# Altium PCB PCB1_IGNIS_v4.PcbDoc (part 1 of 2)
Units mil, origin at the board's own origin, x right, y up, seen from the top; angles counter-clockwise.
Board outline 2952.76 x 1771.65 mil, 4 copper layers (Top Layer, GND, Voltages, Bottom Layer), stack 23.756 mil thick; 108 components, 72 nets, 407 pads, 114 vias.
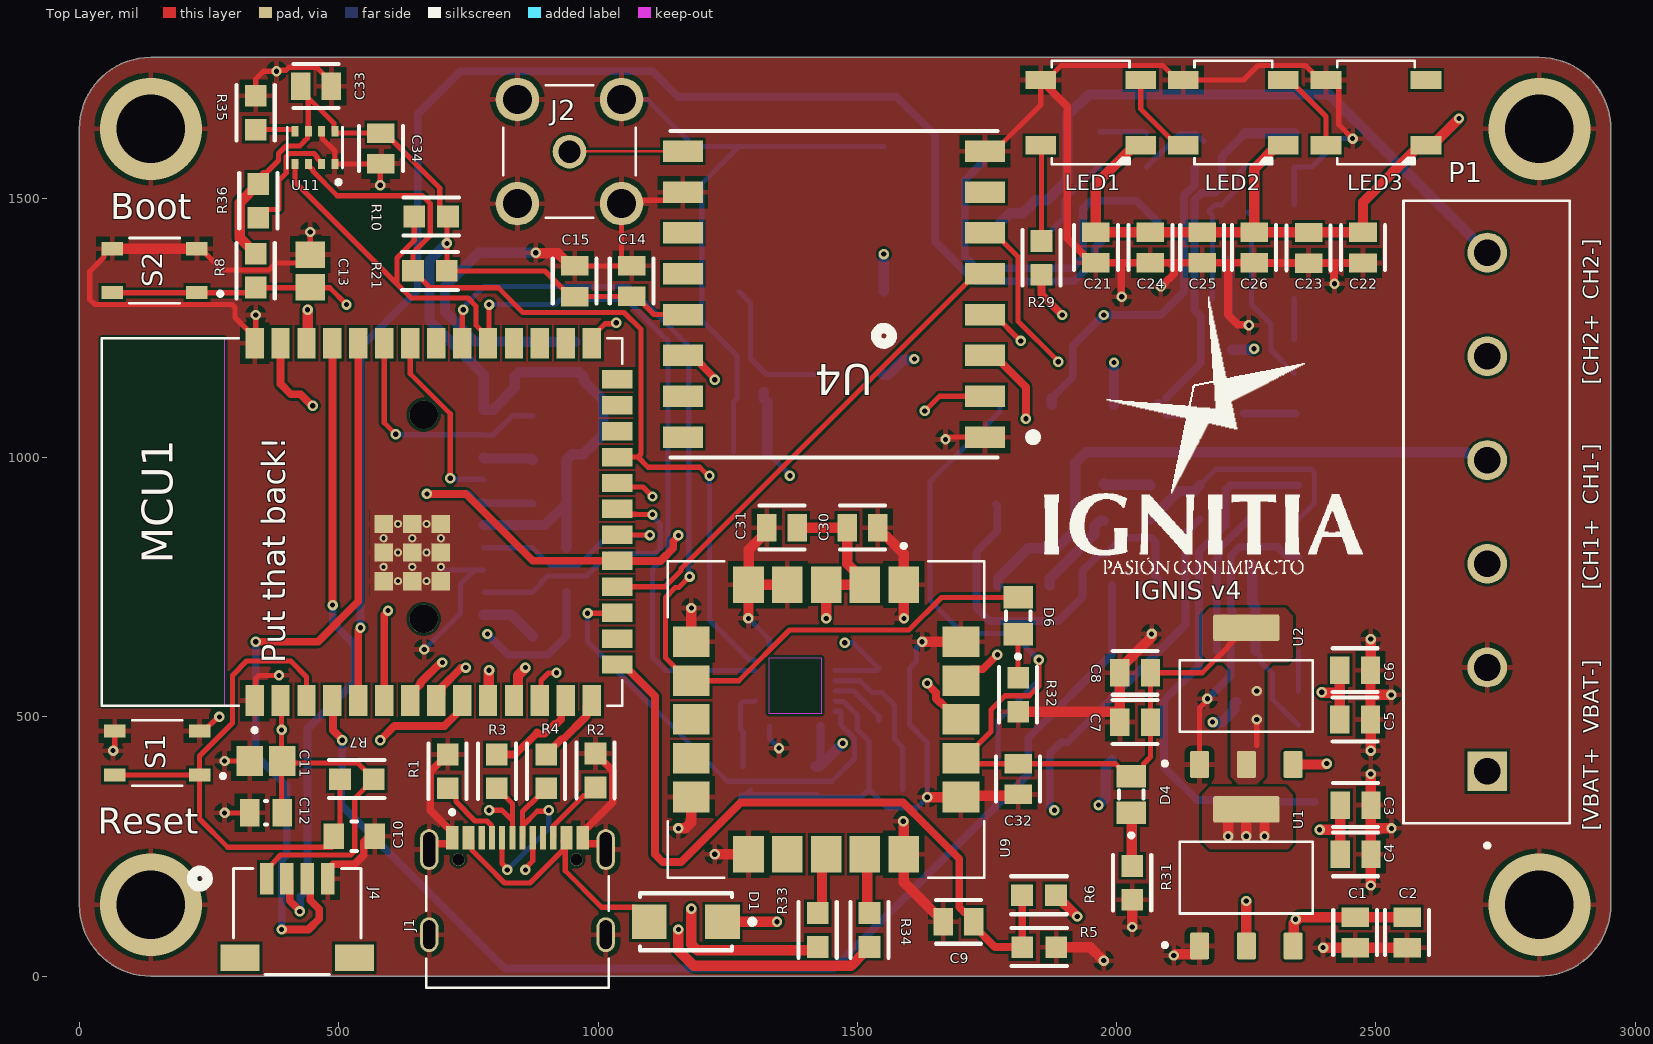
[diagram p0: Top Layer view]
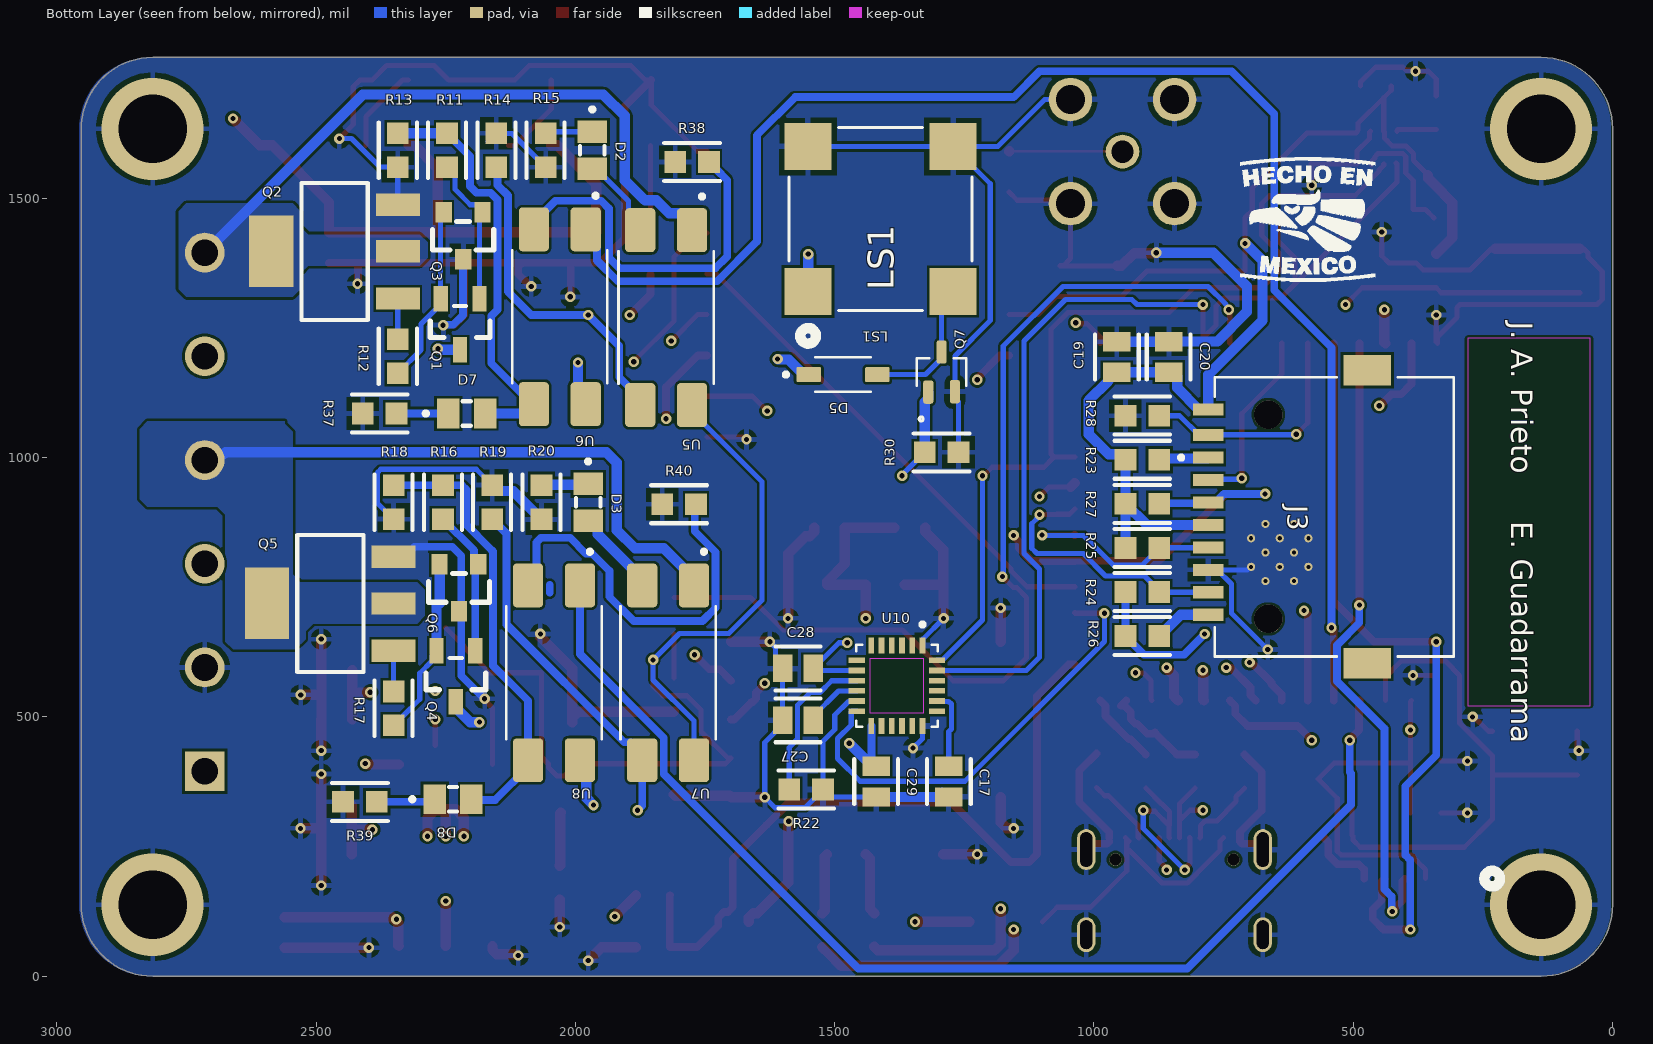
[diagram p1: Bottom Layer view, seen from below]
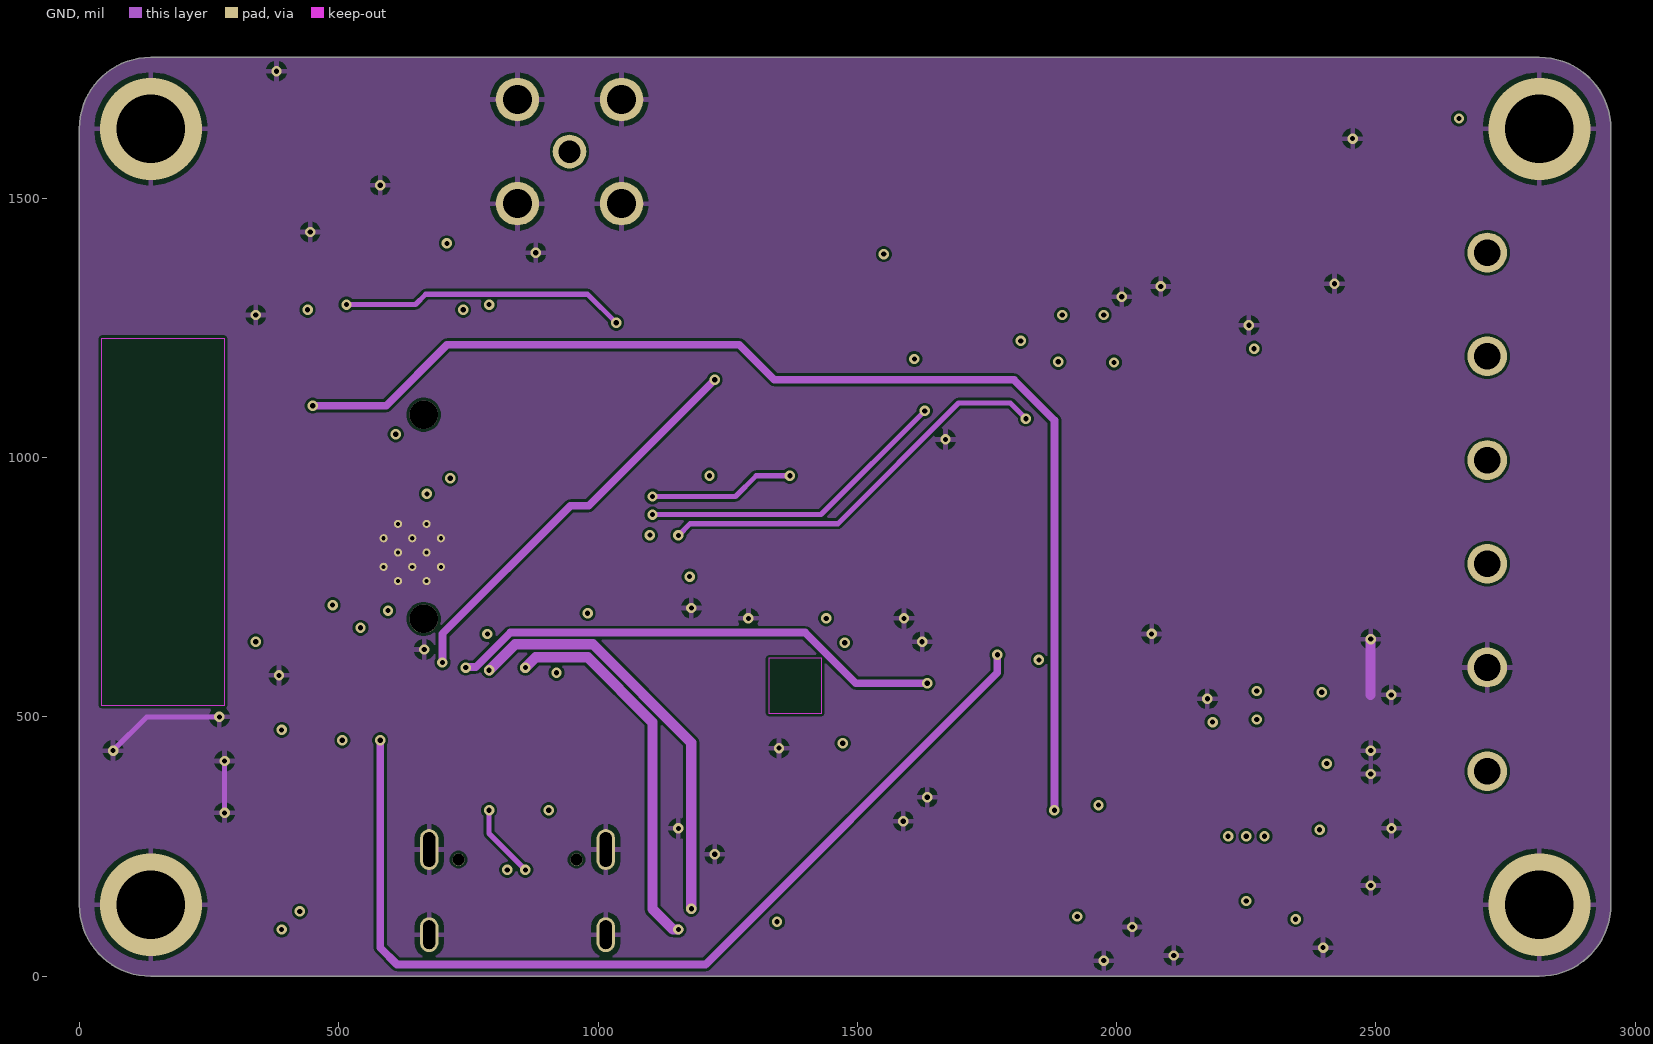
[diagram p2: GND]
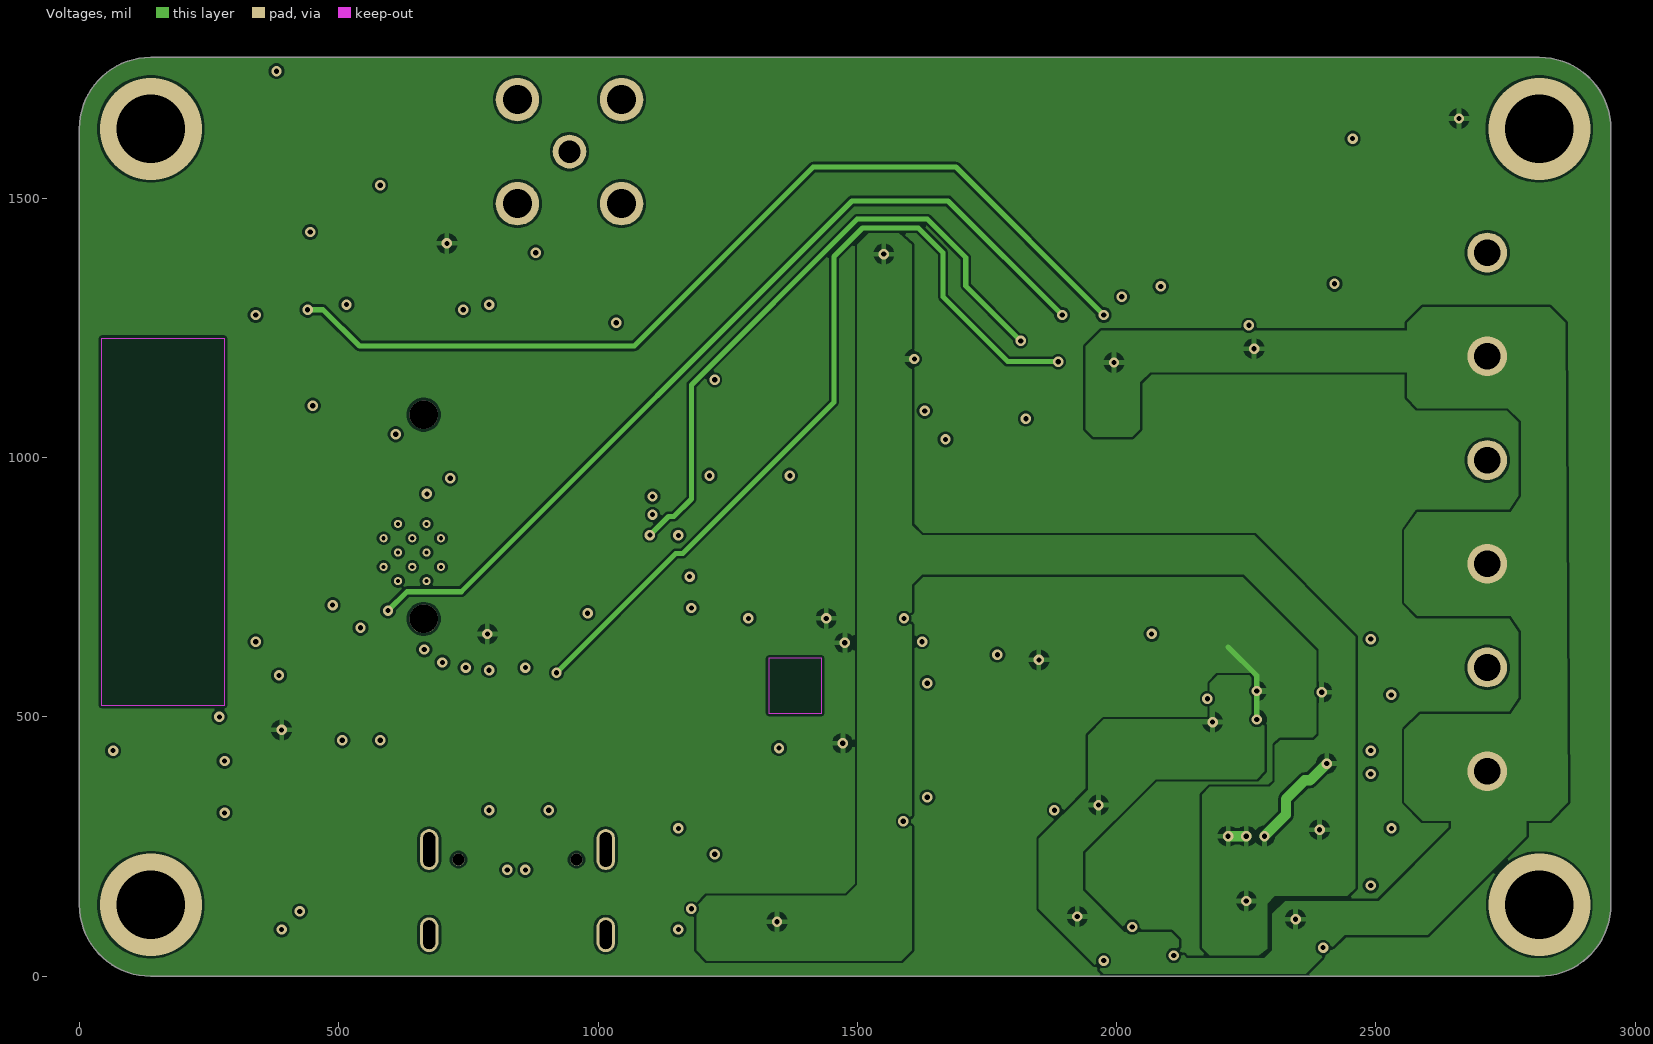
[diagram p3: Voltages]
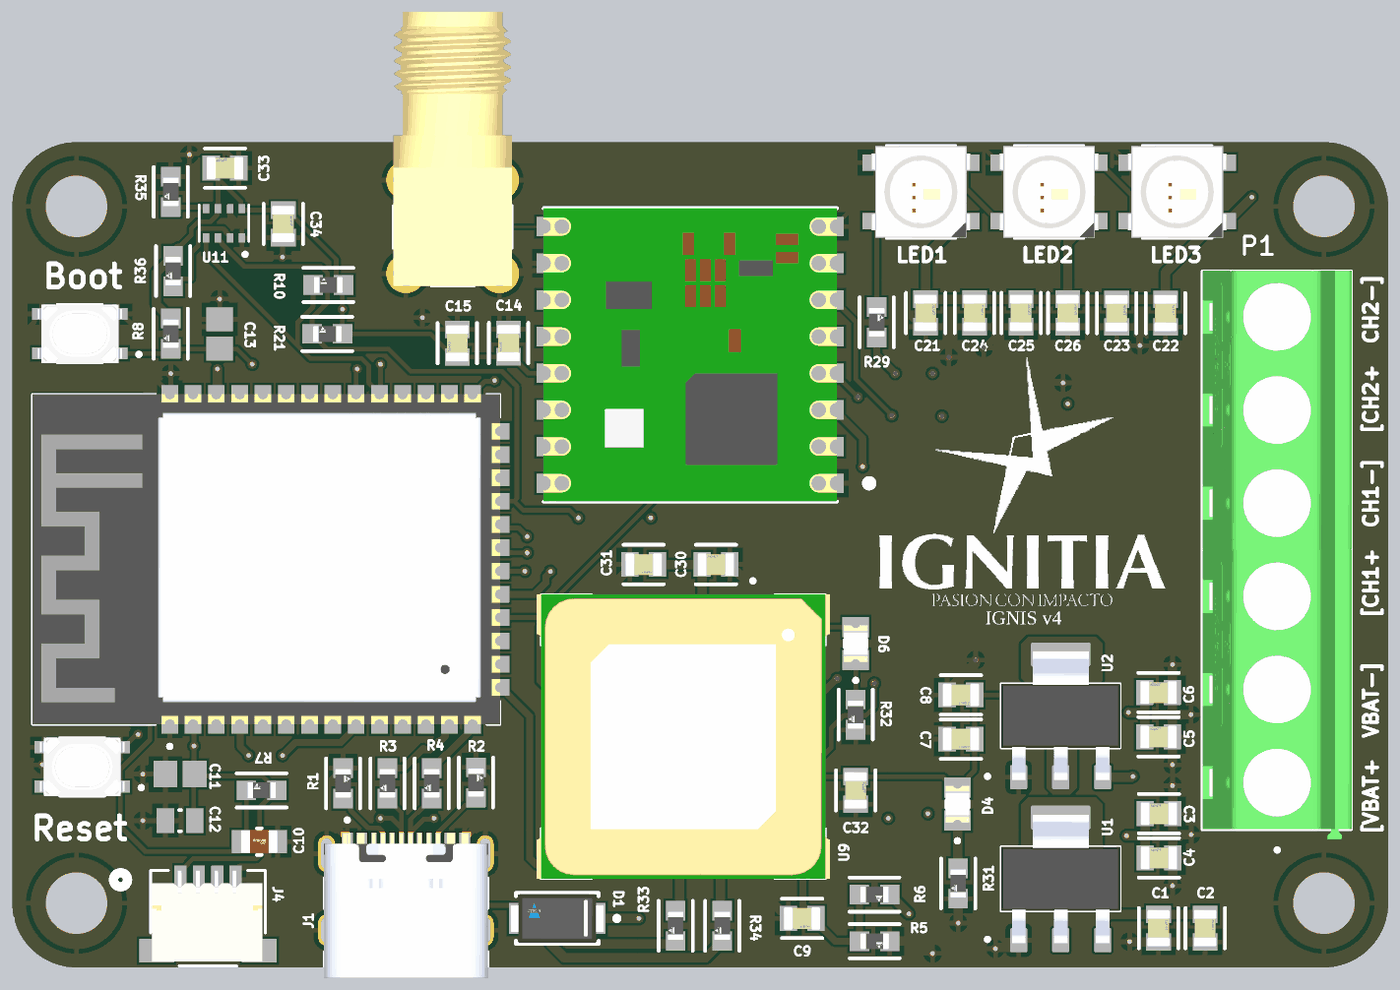
[diagram p5: 3D render of the assembled board from above, using the file's embedded part models]
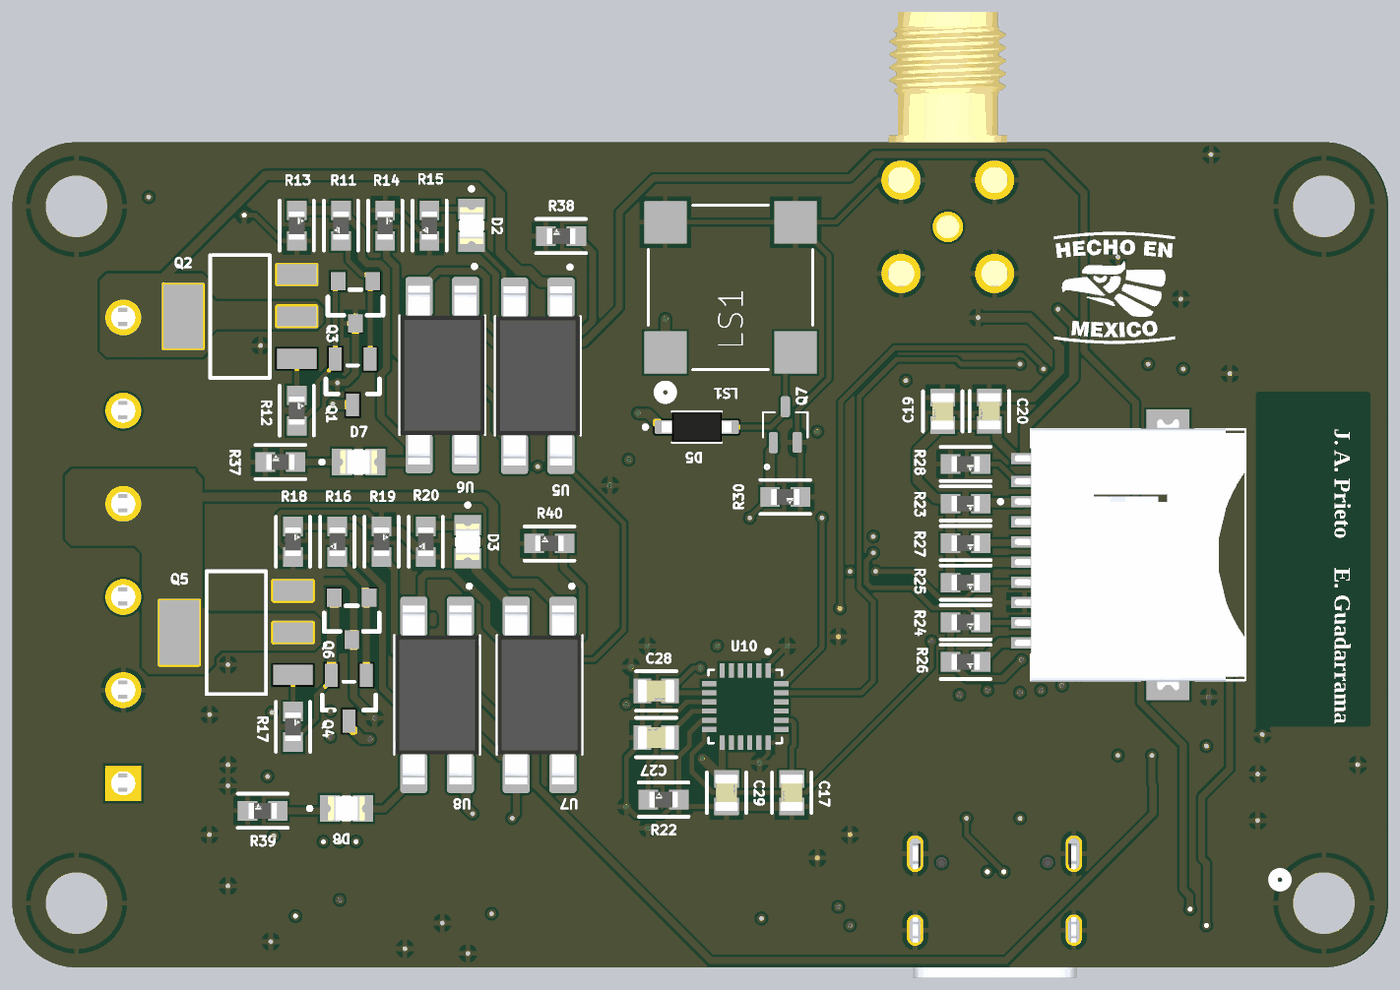
[diagram p6: 3D render of the assembled board from below, using the file's embedded part models]

## Layer stack, top to bottom
Top Solder: solder mask 0.4, Solder Resist, Dk 3.5
Top Layer: signal copper 1.4
Dielectric 2: prepreg 2.8, PP-006, Dk 4.1
GND: signal copper 1.378
Dielectric 1: dielectric 12.6, FR-4, Dk 4.8
Voltages: signal copper 1.378
Dielectric 3: prepreg 2.8, PP-006, Dk 4.1
Bottom Layer: signal copper 1.4
Bottom Solder: solder mask 0.4, Solder Resist, Dk 3.5

## Board outline
137.8,0 cw(c137.8,137.8) 0,137.8 0,1633.86 cw(c137.8,1633.86) 137.8,1771.65 2814.96,1771.65 cw(c2814.96,1633.86) 2952.76,1633.86 2952.76,137.8 cw(c2814.96,137.8) 2814.96,0

## Design rules (kind name [scope] priority, off if disabled: settings)
Clearance USBC_3 [InComponent('J1') vs InComponent('J1')] p1: gap=3.94 ignorepadtopadclearanceinfootprint=FALSE
Clearance MCU_2 [InComponent('MCU1') vs InComponent('MCU1')] p2: gap=1.97 ignorepadtopadclearanceinfootprint=FALSE
Clearance [All] p3: gap=5 ignorepadtopadclearanceinfootprint=FALSE
ComponentClearance GPS [InComponent('U9') vs InComponent('MCU1') Or InComponent('R9')] p1: gap=0 collisioncheckmode=3 verticalgap=100000 showdistances=FALSE donotcheckwithout3dbody=TRUE
ComponentClearance IMU [InComponent('U10') vs InComponent('U9')] p2: gap=0 collisioncheckmode=3 verticalgap=100000 showdistances=FALSE donotcheckwithout3dbody=TRUE
ComponentClearance Buzzer [InComponent('LS1') vs InComponent('R30') Or InComponent('R31') Or InComponent('Q7')  Or InComponent('P1')] p3: gap=0 collisioncheckmode=3 verticalgap=100000 showdistances=FALSE donotcheckwithout3dbody=TRUE
ComponentClearance SD [InComponent('J3') Or InComponent('C19') Or InComponent('C20') Or InComponent('R23') Or InComponent('R24') Or InComponent('R25') Or InComponent('R26') Or InComponent('R27') Or InComponent('R28') vs InComponent('U9') Or InComponent('MCU1')] p4: gap=0 collisioncheckmode=3 verticalgap=100000 showdistances=FALSE donotcheckwithout3dbody=TRUE
ComponentClearance [All] p5: gap=10 collisioncheckmode=3 verticalgap=10 showdistances=FALSE
DiffPairsRouting [All] p1: maxlimit=15 minlimit=15 mostfreqgap=15 toplayer_minwidth=15 toplayer_maxwidth=15 toplayer_prefwidth=15 midlayer1_minwidth=15 midlayer1_maxwidth=15 midlayer1_prefwidth=15 midlayer2_minwidth=15 midlayer2_maxwidth=15 midlayer2_prefwidth=15 bottomlayer_minwidth=15 bottomlayer_maxwidth=15 bottomlayer_prefwidth=15 maxuncoupledlength=500
HoleSize IMU_Hole [All] p1: absolutevalues=TRUE maxlimit=157.48 minlimit=1 maxpercent=80.000 minpercent=20.000
HoleSize "Mounting Holes" [IsVia] p2: absolutevalues=TRUE maxlimit=137.8 minlimit=1 maxpercent=80.000 minpercent=20.000
HoleSize [All] p3: absolutevalues=TRUE maxlimit=100 minlimit=1 maxpercent=80.000 minpercent=20.000
MinimumSolderMaskSliver MPU-6050 [InComponent('U10')] p1: minsoldermaskwidth=8
MinimumSolderMaskSliver USBC_1 [InComponent('J1') vs InComponent('J1')] p2: minsoldermaskwidth=1.18
MinimumSolderMaskSliver [All] p3: minsoldermaskwidth=10
PolygonConnect PolygonConnect_37 [All vs IsNamedPolygon('GND_L01_P062')] p1: connectstyle=Direct reliefconductorwidth=10 reliefentries=4 polygonreliefangle="90 Angle" airgapwidth=10
PolygonConnect PolygonConnect_36 [All vs IsNamedPolygon('GND_L02_P043')] p2: connectstyle=Direct reliefconductorwidth=10 reliefentries=4 polygonreliefangle="90 Angle" airgapwidth=10
PolygonConnect PolygonConnect_35 [All vs IsNamedPolygon('EMATCH_CH1_B_L04_P060') Or IsNamedPolygon('EMATCH_CH2_N_L04_P059')] p3: connectstyle=Direct reliefconductorwidth=10 reliefentries=4 polygonreliefangle="90 Angle" airgapwidth=10
PolygonConnect PolygonConnect_34 [All vs IsNamedPolygon('VCC_3V3_L01_P058')] p4: connectstyle=Direct reliefconductorwidth=10 reliefentries=4 polygonreliefangle="90 Angle" airgapwidth=10
PolygonConnect PolygonConnect_33 [All vs IsNamedPolygon('GND_L04_P055')] p5: connectstyle=Direct reliefconductorwidth=10 reliefentries=4 polygonreliefangle="90 Angle" airgapwidth=10
PolygonConnect PolygonConnect_32 [All vs IsNamedPolygon('GND_L04_P054')] p6: connectstyle=Direct reliefconductorwidth=10 reliefentries=4 polygonreliefangle="90 Angle" airgapwidth=10
PolygonConnect PolygonConnect_31 [All vs IsNamedPolygon('GND_L04_P042')] p7: connectstyle=Direct reliefconductorwidth=10 reliefentries=4 polygonreliefangle="90 Angle" airgapwidth=10
PolygonConnect PolygonConnect_30 [All vs IsNamedPolygon('GND_L02_P043')] p8: connectstyle=Direct reliefconductorwidth=10 reliefentries=4 polygonreliefangle="90 Angle" airgapwidth=10
PolygonConnect PolygonConnect_29 [All vs IsNamedPolygon('GND_L02_P043')] p9: connectstyle=Direct reliefconductorwidth=10 reliefentries=4 polygonreliefangle="90 Angle" airgapwidth=10
PolygonConnect PolygonConnect_28 [All vs IsNamedPolygon('GND_L04_P042')] p10: connectstyle=Direct reliefconductorwidth=10 reliefentries=4 polygonreliefangle="90 Angle" airgapwidth=10
PolygonConnect PolygonConnect_27 [All vs IsNamedPolygon('VCC_5V_L01_P050')] p11: connectstyle=Direct reliefconductorwidth=10 reliefentries=4 polygonreliefangle="90 Angle" airgapwidth=10
PolygonConnect PolygonConnect_26 [All vs IsNamedPolygon('VBAT_L03_P046')] p12: connectstyle=Direct reliefconductorwidth=10 reliefentries=4 polygonreliefangle="90 Angle" airgapwidth=10
PolygonConnect PolygonConnect_25 [All vs IsNamedPolygon('GND_L02_P042')] p13: connectstyle=Direct reliefconductorwidth=10 reliefentries=4 polygonreliefangle="90 Angle" airgapwidth=10
PolygonConnect PolygonConnect_24 [All vs IsNamedPolygon('GND_L02_P043')] p14: connectstyle=Direct reliefconductorwidth=10 reliefentries=4 polygonreliefangle="90 Angle" airgapwidth=10
PolygonConnect PolygonConnect_23 [All vs IsNamedPolygon('GND_L02_P039')] p15: connectstyle=Direct reliefconductorwidth=10 reliefentries=4 polygonreliefangle="90 Angle" airgapwidth=10
PolygonConnect PolygonConnect_22 [All vs IsNamedPolygon('GND_L02_P036')] p16: connectstyle=Direct reliefconductorwidth=10 reliefentries=4 polygonreliefangle="90 Angle" airgapwidth=10
PolygonConnect PolygonConnect_21 [All vs IsNamedPolygon('NONET_L01_P033')] p17: connectstyle=Direct reliefconductorwidth=10 reliefentries=4 polygonreliefangle="90 Angle" airgapwidth=10
PolygonConnect PolygonConnect_20 [All vs IsNamedPolygon('GND_L02_P030')] p18: connectstyle=Relief reliefconductorwidth=10 reliefentries=4 polygonreliefangle="90 Angle" airgapwidth=10
PolygonConnect PolygonConnect_19 [All vs IsNamedPolygon('GND_L02_P032')] p19: connectstyle=Direct reliefconductorwidth=10 reliefentries=4 polygonreliefangle="90 Angle" airgapwidth=10
PolygonConnect PolygonConnect_18 [All vs IsNamedPolygon('GND_L01_P031')] p20: connectstyle=Direct reliefconductorwidth=10 reliefentries=4 polygonreliefangle="90 Angle" airgapwidth=10
PolygonConnect PolygonConnect_17 [All vs IsNamedPolygon('GND_L02_P030')] p21: connectstyle=Direct reliefconductorwidth=10 reliefentries=4 polygonreliefangle="90 Angle" airgapwidth=10
PolygonConnect PolygonConnect_16 [All vs IsNamedPolygon('NONET_L01_P029')] p22: connectstyle=Direct reliefconductorwidth=10 reliefentries=4 polygonreliefangle="90 Angle" airgapwidth=10
PolygonConnect PolygonConnect_15 [All vs IsNamedPolygon('NONET_L02_P028')] p23: connectstyle=Direct reliefconductorwidth=10 reliefentries=4 polygonreliefangle="90 Angle" airgapwidth=10
PolygonConnect PolygonConnect_14 [All vs IsNamedPolygon('VCC_3V3_L02_P025')] p24: connectstyle=Direct reliefconductorwidth=10 reliefentries=4 polygonreliefangle="90 Angle" airgapwidth=10
PolygonConnect PolygonConnect_13 [All vs IsNamedPolygon('VCC_3V3_L01_P026')] p25: connectstyle=Direct reliefconductorwidth=10 reliefentries=4 polygonreliefangle="90 Angle" airgapwidth=10
PolygonConnect PolygonConnect_12 [All vs IsNamedPolygon('VCC_5V_L02_P023')] p26: connectstyle=Direct reliefconductorwidth=10 reliefentries=4 polygonreliefangle="90 Angle" airgapwidth=10
PolygonConnect PolygonConnect_11 [All vs IsNamedPolygon('VCC_5V_L01_P027')] p27: connectstyle=Direct reliefconductorwidth=10 reliefentries=4 polygonreliefangle="90 Angle" airgapwidth=10
PolygonConnect PolygonConnect_10 [All vs IsNamedPolygon('VBAT_MON_L02_P021')] p28: connectstyle=Direct reliefconductorwidth=10 reliefentries=4 polygonreliefangle="90 Angle" airgapwidth=10
PolygonConnect PolygonConnect_9 [All vs IsNamedPolygon('VBAT_MON_L02_P020')] p29: connectstyle=Direct reliefconductorwidth=10 reliefentries=4 polygonreliefangle="90 Angle" airgapwidth=10
PolygonConnect PolygonConnect_8 [All vs IsNamedPolygon('VBAT_MON_L01_P016')] p30: connectstyle=Direct reliefconductorwidth=10 reliefentries=4 polygonreliefangle="90 Angle" airgapwidth=10
PolygonConnect PolygonConnect_7 [All vs IsNamedPolygon('VBAT_L02_P015')] p31: connectstyle=Direct reliefconductorwidth=10 reliefentries=4 polygonreliefangle="90 Angle" airgapwidth=10
PolygonConnect PolygonConnect_6 [All vs IsNamedPolygon('EMATCH_CH2_N_L02_P014')] p32: connectstyle=Direct reliefconductorwidth=10 reliefentries=4 polygonreliefangle="90 Angle" airgapwidth=10
PolygonConnect PolygonConnect_5 [All vs IsNamedPolygon('EMATCH_CH1_B_L02_P011')] p33: connectstyle=Direct reliefconductorwidth=10 reliefentries=4 polygonreliefangle="90 Angle" airgapwidth=10
PolygonConnect PolygonConnect_4 [All vs IsNamedPolygon('EMATCH_CH1_B_L02_P010')] p34: connectstyle=Direct reliefconductorwidth=10 reliefentries=4 polygonreliefangle="90 Angle" airgapwidth=10
PolygonConnect PolygonConnect_3 [All vs IsNamedPolygon('VBAT_L02_P003')] p35: connectstyle=Direct reliefconductorwidth=10 reliefentries=4 polygonreliefangle="90 Angle" airgapwidth=10
PolygonConnect PolygonConnect_2 [All vs IsNamedPolygon('VBAT_L02_P003') And IsNamedPolygon('EMATCH_CH1_B_L02_P010') And IsNamedPolygon('EMATCH_CH1_B_L02_P011') And IsNamedPolygon('EMATCH_CH2_N_L02_P014')] p36: connectstyle=Direct reliefconductorwidth=10 reliefentries=4 polygonreliefangle="90 Angle" airgapwidth=10
PolygonConnect PolygonConnect_1 [All vs IsNamedPolygon('VBAT_L02_P003') And IsNamedPolygon('EMATCH_CH1_B_L02_P010') And IsNamedPolygon('EMATCH_CH1_B_L02_P011') And IsNamedPolygon('EMATCH_CH2_N_L02_P014')] p37: connectstyle=Direct reliefconductorwidth=10 reliefentries=4 polygonreliefangle="90 Angle" airgapwidth=10
PolygonConnect [All] p38: connectstyle=Relief reliefconductorwidth=10 reliefentries=4 polygonreliefangle="90 Angle" airgapwidth=10
RoutingVias [All] p1: holewidth=10 width=20 viastyle="Through Hole" minholewidth=10 minwidth=20 maxholewidth=15 maxwidth=25
SilkToSolderMaskClearance MCU_GPS [InComponent('MCU1') vs InComponent('U9')] p1: minsilkscreentomaskgap=1.97 clearancetoexposedcopper=TRUE
SilkToSolderMaskClearance Diodes [InComponent('D1') Or InComponent('D2') Or InComponent('D3') Or InComponent('D4') Or InComponent('D5') Or InComponent('D6') Or InComponent('D7') Or InComponent('D8')] p2: minsilkscreentomaskgap=1.97 clearancetoexposedcopper=TRUE
SilkToSolderMaskClearance USBC_2 [InComponent('J1') vs InComponent('J1')] p3: minsilkscreentomaskgap=1.18 clearancetoexposedcopper=TRUE
SilkToSolderMaskClearance [IsPad] p4: minsilkscreentomaskgap=3.94 clearancetoexposedcopper=TRUE
SolderMaskExpansion [All] p1: expansion=0 istentingtop=FALSE
SupplyNets "Schematic Supply Nets_3" [InNet('VCC_3V3')] p1: voltage=0.000
SupplyNets "Schematic Supply Nets_2" [InNet('GND')] p2: voltage=0.000
SupplyNets "Schematic Supply Nets_1" [InNet('VBAT')] p3: voltage=0.000
SupplyNets "Schematic Supply Nets" [InNet('VCC_5V')] p4: voltage=0.000
Width [All] p1: maxlimit=150 minlimit=4 preferedwidth=10 minimp=50.000000 maximp=50.000000 favimp=50.000000
25 further rules are at their usual default settings.

## Classes and differential pairs
component class U_Storage: C19 C20 J3 R23 R24 R25 R26 R27 R28
component class U_Sensors: C17 C27 C28 C29 C33 C34 R10 R21 R22 R35 R36 U10 U11
component class U_RF_LoRa_&_GPS: C14 C15 C30 C31 C32 D6 J2 R32 R33 R34 U4 U9
component class U_Pyros: D2 D3 D7 D8 P1 Q1 Q2 Q3 Q4 Q5 Q6 R11 R12 R13 R14 R15 R16 R17 R18 R19 R20 R37 R38 R39 R40 U5 U6 U7 U8
component class U_Power: C1 C2 C3 C4 C5 C6 C7 C8 C9 D1 D4 J1 J4 R1 R2 R3 R4 R5 R6 R31 U1 U2
component class U_Indicators: C21 C22 C23 C24 C25 C26 D5 LED1 LED2 LED3 LS1 Q7 R29 R30
component class Main: C10 C11 C12 C13 MCU1 R7 R8 S1 S2
differential pair USB2: +USB2_P -USB2_N

## Components (designator, comment, footprint, x,y, rotation, side; value= is the part's Value field where it differs from the comment)
C1 "10uF" FP-C0805C-DN-MFG 2460,84.17 r270 top value="10 uF"
C2 "100nF" FP-C0805C-DN-MFG 2560,84.17 r270 top value="100 nF"
C3 "10uF" FP-C0805C-DN-MFG 2460.83,330 r0 top value="10 uF"
C4 "100nF" FP-C0805C-DN-MFG 2460.83,235 r0 top value="100 nF"
C5 "10uF" FP-C0805C-DN-MFG 2460,495 r0 top value="10 uF"
C6 "100nF" FP-C0805C-DN-MFG 2460,590 r0 top value="100 nF"
C7 "10uF" FP-C0805C-DN-MFG 2035.83,490 r180 top value="10 uF"
C8 "100nF" FP-C0805C-DN-MFG 2035.83,585 r180 top value="100 nF"
C9 "100nF" FP-C0805C-DN-MFG 1695,105 r180 top value="100 nF"
C10 "1uF" FP-0805-L_2_01_0_2-W_1_25-MFG 530,270 r0 top
C11 "100nF" CAPC2013X145X50NL20T25 360,415 r180 top
C12 "22uF" CAPC0805(2012)145_L 360,315 r180 top
C13 "100nF" CAPC2013X145X50NL20T25 445,1360 r270 top
C14 "100nF" FP-C0805C-DN-MFG 1065,1340.47 r90 top value="100 nF"
C15 "10uF" FP-C0805C-DN-MFG 955,1340 r90 top value="10 uF"
C17 "220pF" FP-C0805C-DN-MFG 1280,375 r90 bottom value="220 pF"
C19 "22uF" FP-C0805C-DN-MFG 955.96,1193.7 r90 bottom value="22 uF"
C20 "100nF" FP-C0805C-DN-MFG 855.96,1194.17 r90 bottom value="100 nF"
C21 "100nF" FP-C0805C-DN-MFG 1960,1405 r270 top value="100 nF"
C22 "100nF" FP-C0805C-DN-MFG 2475,1404.65 r270 top value="100 nF"
C23 "100nF" FP-C0805C-DN-MFG 2370,1404.53 r270 top value="100 nF"
C24 "10uF" FP-C0805C-DN-MFG 2065,1405 r270 top value="10 uF"
C25 "10uF" FP-C0805C-DN-MFG 2165,1405 r270 top value="10 uF"
C26 "10uF" FP-C0805C-DN-MFG 2265,1405 r270 top value="10 uF"
C27 "100nF" FP-C0805C-DN-MFG 1570.83,493.43 r180 bottom value="100 nF"
C28 "100nF" FP-C0805C-DN-MFG 1570.83,593.43 r0 bottom value="100 nF"
C29 "100nF" FP-C0805C-DN-MFG 1420,375 r270 bottom value="100 nF"
C30 "100nF" FP-C0805C-DN-MFG 1510,865 r0 top value="100 nF"
C31 "100nF" FP-C0805C-DN-MFG 1355,865 r180 top value="100 nF"
C32 "100nF" FP-C0805C-DN-MFG 1810,380 r270 top value="100 nF"
C33 "100nF" FP-C0805C-DN-MFG 456.47,1716.2 r0 top value="100 nF"
C34 "100nF" FP-C0805C-DN-MFG 581.47,1596.2 r270 top value="100 nF"
D1 "SS24SHE3_B/H" FP-95400-MFG 1169.53,105 r180 top
D2 "SML-LXT0805IW-TR" LEDC2012X120N 1967.35,1592.65 r270 bottom
D3 "SML-LXT0805IW-TR" LEDC2012X120N 1975.34,913.8 r270 bottom
D4 "SML-LXT0805IW-TR" LEDC2012X120N 2028.31,350.35 r90 top
D5 "1N4148W-7" SOD3715X135N 1483.86,1160 r180 bottom
D6 "SML-LXT0805IW-TR" LEDC2012X120N 1810,695 r90 top
D7 "SML-LXT0805IW-TR" LEDC2012X120N 2209.57,1085 r180 bottom
D8 "SML-LXT0805IW-TR" LEDC2012X120N 2235.78,341.24 r180 bottom
J1 "TYPE-C-31-M-12" HRO_TYPE-C-31-M-12 844.72,80 r0 top
J2 "BWSMA-KE-Z001" BAT_WIRELESS_BWSMA-KE-Z001 945,1590 r180 top
J3 "MSD-11-A" CUI_MSD-11-A 536.69,885.83 r90 bottom
J4 "SM04B-SRSS-TB" CONN_SM04B-SRSS-TB_JST 420,105.5 r180 top
LED1 "WS2812B" *LED3535 1950,1665 r180 top
LED2 "WS2812B" *LED3535 2225,1665 r180 top
LED3 "WS2812B" *LED3535 2500,1665 r180 top
LS1 "MLT-8530" MLT-8530_JHE 1411.51,1460 r90 bottom
MCU1 "ESP32-S3-WROOM-1-N16R8" XCVR_ESP32-S3-WROOM-1-N16R2 545,875.98 r90 top
P1 "1729160" PHOENIX_1729160 2874.02,295.28 r90 top
Q1 "S8050_NPN" PCBComponent_1#1 2224.87,1263.04 r90 bottom
Q2 "NCE6005AR_Mosfet_N" PCBComponent_1#2 2468.85,1401.5 r180 bottom
Q3 "SS8550_PNP" PCBComponent_1#3 2217.35,1417.65 r90 bottom
Q4 "S8050_NPN" PCBComponent_1#1 2232.86,584.19 r90 bottom
Q5 "NCE6005AR_Mosfet_N" PCBComponent_1#2 2476.84,722.65 r180 bottom
Q6 "SS8550_PNP" PCBComponent_1#3 2225.34,738.8 r90 bottom
Q7 "NTS4001NT1G" SOT65P220X100-3N 1293.86,1165 r90 bottom
R1 "5.1k" FP-MCT0603-IPC_A 710,395 r90 top
R2 "5.1k" FP-MCT0603-IPC_A 995,396.71 r90 top
R3 "22" FP-MCT0603-IPC_A 805,395 r270 top
R4 "22" FP-MCT0603-IPC_A 900,395 r270 top
R5 "47k" FP-MCT0603-IPC_A 1850.65,56.15 r0 top
R6 "100k" FP-MCT0603-IPC_A 1850.34,156.15 r0 top
R7 "10k" FP-MCT0603-IPC_A 535,380 r180 top
R8 "10k" FP-MCT0603-IPC_A 340,1360.47 r270 top
R10 "4k7" FP-MCT0603-IPC_A 678.29,1465 r180 top
R11 "1k" FP-MCT0603-IPC_A 2247.35,1592.65 r270 bottom
R12 "100" FP-MCT0603-IPC_A 2342.35,1195.3 r90 bottom
R13 "1k" FP-MCT0603-IPC_A 2342.35,1592.65 r90 bottom
R14 "1k" FP-MCT0603-IPC_A 2152.35,1592.65 r90 bottom
R15 "680" FP-MCT0603-IPC_A 2057.35,1592.65 r270 bottom
R16 "1k" FP-MCT0603-IPC_A 2255.34,913.8 r270 bottom
R17 "100" FP-MCT0603-IPC_A 2350.34,516.45 r90 bottom
R18 "1k" FP-MCT0603-IPC_A 2350.34,913.8 r90 bottom
R19 "1k" FP-MCT0603-IPC_A 2160.34,913.8 r90 bottom
R20 "680" FP-MCT0603-IPC_A 2065.34,913.8 r270 bottom
R21 "4k7" FP-MCT0603-IPC_A 675.94,1360 r180 top
R22 "4k7" FP-MCT0603-IPC_A 1555,360 r0 bottom
R23 "10k" FP-MCT0603-IPC_A 906.69,995.83 r180 bottom
R24 "10k" FP-MCT0603-IPC_A 906.69,740.83 r180 bottom
R25 "10k" FP-MCT0603-IPC_A 906.69,825.83 r180 bottom
R26 "10k" FP-MCT0603-IPC_A 906.69,655.83 r180 bottom
R27 "10k" FP-MCT0603-IPC_A 906.69,910.83 r180 bottom
R28 "10k" FP-MCT0603-IPC_A 906.69,1080.83 r180 bottom
R29 "33" FP-MCT0603-IPC_A 1855,1385 r90 top
R30 "10k" FP-MCT0603-IPC_A 1293.86,1010 r180 bottom
R31 "1k" FP-MCT0603-IPC_A 2030,180 r270 top
R32 "1k" FP-MCT0603-IPC_A 1810,542.65 r270 top
R33 "470" FP-MCT0603-IPC_A 1423.61,89.14 r270 top
R34 "470" FP-MCT0603-IPC_A 1523.61,89.14 r270 top
R35 "10k" FP-MCT0603-IPC_A 340,1665 r270 top
R36 "10k" FP-MCT0603-IPC_A 345,1495 r270 top
R37 "1k" FP-MCT0603-IPC_A 2377.35,1085 r0 bottom
R38 "100" FP-MCT0603-IPC_A 1775,1570 r0 bottom
R39 "1k" FP-MCT0603-IPC_A 2415.34,336.24 r0 bottom
R40 "100" FP-MCT0603-IPC_A 1800,910 r0 bottom
S1 "Reset" SW_SKRPABE010 150,430.47 r180 top
S2 "Boot" SW_SKRPABE010 145,1360.47 r180 top
U1 "AMS1117-5.0" SOT229P700X180-4N 2250,190 r0 top
U2 "AMS1117-3.3" SOT229P700X180-4N 2250,540 r0 top
U4 "RFM95W-868S2" XCVR_RFM95W-868S2 1455,1315 r180 top
U5 "PC817X2NIP1B" SOIC254P960X420-4N 1825,1270 r270 bottom
U6 "PC817X2NIP1B" SOIC254P960X420-4N 2030,1271.5 r270 bottom
U7 "PC817X2NIP1B" SOIC254P960X420-4N 1821.15,585 r270 bottom
U8 "PC817X2NIP1B" SOIC254P960X420-4N 2041.15,585 r270 bottom
U9 "SAM-M10Q-00B" XCVR_SAM-M10Q-00B 1439.84,495.16 r270 top
U10 "MPU-6050-A" QFN50P400X400X95-24N 1380,560 r270 bottom
U11 "BMP280" XDCR_BMP280 454.26,1597.7 r270 top

## Footprints (in the part's own frame and the unit in brackets; to place one, negate y for a bottom-side part, rotate by r counter-clockwise, add the part's x,y. Pads: shape width x height; smd on the part's side, far side on the other; paste and mask are expansions set on the pad)
*LED3535 [mm]
  rect 1.5x0.9 smd: 1(-2.45,1.6) 2(-2.45,-1.6) 3(2.45,-1.6) 4(2.45,1.6)
  silkscreen extent -1.91,-2.53 1.9,2.54, body extent -2.7,-2.5 2.7,2.5, height 1.49
BAT_WIRELESS_BWSMA-KE-Z001 [mm]
  round 1.65 hole 1.1: 1(0,0)
  round 2.13 hole 1.42: 2_1(-2.55,2.55) 2_2(2.55,2.55) 2_3(2.55,-2.55) 2_4(-2.55,-2.55)
  silkscreen extent -3.25,-3.25 3.25,3.25, body extent -3.23,-11.73 3.23,3.23, height 9.75
CAPC0805(2012)145_L [mm] "Chip Capacitor, Body 2.0x1.2mm, Height 1.45mm, IPC High Density"
  rect 0.95x1.35 smd: 1(-0.8,0) 2(0.8,0)
  silkscreen extent -0.05,-0.58 0.05,0.58, body extent -1.1,-0.72 1.1,0.72, height 1.45
CAPC2013X145X50NL20T25 [mm] "Chip Capacitor, 2-Leads, Body 2.00x1.25mm, IPC Medium Density"
  rect 1.3x1.45 smd: 1(-0.8,0) 2(0.8,0)
  body extent -1.1,-0.72 1.1,0.72, height 1.45
CONN_SM04B-SRSS-TB_JST [mil]
  rect 26x61 smd paste+0 mask+0: 1(59.06,-82.62) 2(19.69,-82.62) 3(-19.68,-82.62) 4(-59.06,-82.62)
  rect 75x51 smd paste+0 mask+0: 5(-110.24,69.94) 6(110.24,69.94)
  silkscreen extent -123,-103 203,103, body extent -116,-102 120,92, height 117
CUI_MSD-11-A [mm]
  rect 0.6x1.5 smd: CD(5.25,6.18) P1(2.9,6.18) P2(1.8,6.18) P3(0.7,6.18) P4(-0.4,6.18) P5(-1.5,6.18) P6(-2.6,6.18) P7(-3.7,6.18) P8(-4.8,6.18) WP(4,6.18)
  rect 1.5x2.34 smd: G1(-7.17,-1.62) G2(7.17,-1.62)
  round 1.4 hole 1.4 unplated: ""(-5,3.23) ""(5,3.23)
  silkscreen extent -6.84,-5.85 6.84,7.6, body extent -7.39,-5.87 7.39,6.73, height 1.95
FP-0805-L_2_01_0_2-W_1_25-MFG [mm]
  rect 1x1.25 smd paste+0 mask+0: 1(-1,0) 2(1,0)
  silkscreen extent -0.13,-0.72 0.13,0.72, body extent -1.6,-0.82 1.6,0.82, height 0.25
FP-95400-MFG [mm]
  rect 1.7x1.68 smd paste+0 mask+0: 1(-1.79,0) 2(1.79,0)
  silkscreen extent -3.38,-1.4 2.25,1.4, body extent -2.55,-1.33 2.55,1.33, height 2.29
FP-C0805C-DN-MFG [mm]
  rect 0.95x1.35 smd paste+0 mask+0: 1(-0.75,0) 2(0.75,0)
  silkscreen extent -1.1,-1.07 1.1,1.07, body extent -1,-0.63 1,0.63, height 0.88
FP-MCT0603-IPC_A [mil]
  rect 41.88x41.82 smd paste+0 mask+0: 1(-32.65,0) 2(32.65,0)
  silkscreen extent -54,-37 54,37, body extent -73,-41 73,41, height 10
HRO_TYPE-C-31-M-12 [mm]
  rect 0.6x1.14 smd mask+0.05: A1_B12(-3.2,4.75) A4_B9(-2.4,4.75) B1_A12(3.2,4.75) B4_A9(2.4,4.75)
  rect 0.3x1.14 smd mask+0.05: A5(-1.25,4.75) A6(-0.25,4.75) A7(0.25,4.75) A8(1.25,4.75) B5(1.75,4.75) B6(0.75,4.75) B7(-0.75,4.75) B8(-1.75,4.75)
  oval 0.9x2 hole 0.6 slot 1.7 at 90 deg: S1(-4.325,4.17) S2(4.325,4.17)
  oval 0.9x1.7 hole 0.6 slot 1.4 at 90 deg: S3(-4.325,0) S4(4.325,0)
  round 0.6 hole 0.6 unplated: ""(-2.89,3.68) ""(2.89,3.68)
  silkscreen extent -4.47,-2.6 4.47,6.1, body extent -4.47,-2.6 4.47,5.31, height 3.31
LEDC2012X120N [mm]
  rect 1.1x1.45 smd: A(0.9,0) C(-0.9,0)
  silkscreen extent -2.1,-0.6 0.2,0.6, body extent -1,-0.65 1,0.65, height 0.9
MLT-8530_JHE [mil]
  rect 91x91 smd paste+0 mask+0: 1(-139.76,139.76) 2(-139.76,-139.76) 3(139.76,139.76) 4(139.76,-139.76)
  silkscreen extent -240,-176 176,176
PCBComponent_1#1 [mm]
  rect 1.25x0.7 smd paste+0 mask+0.102: 1(1.092,-1.014) 2(1.092,0.886) 3(-1.407,-0.064)
  silkscreen extent -0.81,-1.52 0.74,1.4
PCBComponent_1#2 [mm]
  rect 2.159x1.092 smd paste+0 mask+0.102: 1(3.213,-2.409) 2(3.213,-0.098) 3(3.213,2.188)
  rect 2.159x3.505 smd paste+0 mask+0.102: 4(-2.984,-0.098)
  silkscreen extent -1.51,-3.46 1.74,3.24
PCBComponent_1#3 [mm]
  rect 1x0.8 smd paste+0 mask+0.051: 1(1.403,-0.974) 2(1.403,0.926) 3(-0.897,-0.024)
  silkscreen extent -0.45,-1.52 0.95,1.48
PHOENIX_1729160 [mm]
  rect 1.95x1.95 / inner round 1.95 / far side rect 1.95x1.95 hole 1.3: 1(2.54,4.05)
  round 1.95 hole 1.3: 2(7.62,4.05) 3(12.7,4.05) 4(17.78,4.05) 5(22.86,4.05) 6(27.94,4.05)
  silkscreen extent -1.2,0 30.48,8.15, body extent -0.54,-0.02 30.51,8.13, height 9.97
QFN50P400X400X95-24N [mm]
  rect 0.79x0.28 smd: 1(-1.97,1.25) 2(-1.97,0.75) 3(-1.97,0.25) 4(-1.97,-0.25) 5(-1.97,-0.75) 6(-1.97,-1.25) 13(1.97,-1.25) 14(1.97,-0.75) 15(1.97,-0.25) 16(1.97,0.25) 17(1.97,0.75) 18(1.97,1.25)
  rect 0.28x0.79 smd: 7(-1.25,-1.97) 8(-0.75,-1.97) 9(-0.25,-1.97) 10(0.25,-1.97) 11(0.75,-1.97) 12(1.25,-1.97) 19(1.25,1.97) 20(0.75,1.97) 21(0.25,1.97) 22(-0.25,1.97) 23(-0.75,1.97) 24(-1.25,1.97)
  Keep-Out Layer region: 1.35,-1.3 -1.35,-1.3 -1.35,1.3 1.35,1.3
  silkscreen extent -3.1,-2 2,2, body extent -2,-2 2,2, height 0.25
SOD3715X135N [mm]
  rrect18% 1.21x0.73 smd paste+0 mask+0.102: A(1.68,0) C(-1.68,0)
  silkscreen extent -2.9,-0.85 1.35,0.85, body extent -1.91,-0.8 1.9,0.8, height 1.1
SOIC254P960X420-4N [mm]
  rrect25% 2.15x1.48 smd: 1(-4.28,1.27) 2(-4.28,-1.27) 3(4.28,-1.27) 4(4.28,1.27)
  silkscreen extent -6.03,-2.33 3.25,2.33, body extent -4.87,-2.29 4.87,2.29, height 4
SOT65P220X100-3N [mm]
  rrect50% 1.15x0.5 smd: 1(-0.98,0.65) 2(-0.96,-0.65) 3(0.98,0)
  silkscreen extent -2.4,-1.21 0.68,1.21
SOT229P700X180-4N [mm]
  rrect15% 0.93x1.31 smd: 1(-2.29,-3.345) 2(0,-3.345) 3(2.29,-3.345)
  rrect15% 3.24x1.31 smd: 2(0,3.345)
  silkscreen extent -4.09,-3.4 3.25,1.75, body extent -3.25,-3.5 3.25,3.5, height 1.8
SW_SKRPABE010 [mm]
  rect 1.05x0.65 smd: 1(-2.075,1.075) 2(2.075,1.075) 3(-2.075,-1.075) 4(2.075,-1.075)
  silkscreen extent -3.32,-1.6 1.23,1.6, body extent -2.3,-1.6 2.3,1.6, height 2.5
XCVR_ESP32-S3-WROOM-1-N16R2 [mm]
  rect 1.5x0.9 smd: 2(-8.75,3.99) 3(-8.75,2.72) 4(-8.75,1.45) 5(-8.75,0.18) 6(-8.75,-1.09) 7(-8.75,-2.36) 8(-8.75,-3.63) 9(-8.75,-4.9) 10(-8.75,-6.17) 11(-8.75,-7.44) 12(-8.75,-8.71) 13(-8.75,-9.98) 14(-8.75,-11.25) 27(8.75,-11.25) 28(8.75,-9.98) 29(8.75,-8.71) 30(8.75,-7.44) 31(8.75,-6.17) 32(8.75,-4.9) 33(8.75,-3.63) 34(8.75,-2.36) 35(8.75,-1.09) 36(8.75,0.18) 37(8.75,1.45) 38(8.75,2.72) 39(8.75,3.99) GND(-8.75,5.26) GND(8.75,5.26)
  rect 0.9x1.5 smd: 15(-6.985,-12.5) 16(-5.715,-12.5) 17(-4.445,-12.5) 18(-3.175,-12.5) 19(-1.905,-12.5) 20(-0.635,-12.5) 21(0.635,-12.5) 22(1.905,-12.5) 23(3.175,-12.5) 24(4.445,-12.5) 25(5.715,-12.5) 26(6.985,-12.5)
  round 0.4 hole 0.2 mask+0: 41_10(-1.5,-1.76) 41_11(-2.9,-1.76) 41_12(-0.1,-1.76) 41_13(-2.9,-3.16) 41_14(-1.5,-3.16) 41_15(-0.1,-3.16) 41_16(-2.2,-1.06) 41_17(-0.8,-1.06) 41_18(-2.2,-2.46) 41_19(-0.8,-2.46) 41_20(-2.2,-3.86) 41_21(-0.8,-3.86)
  rect 0.9x0.9 smd: GND(-2.9,-2.46) GND(-2.9,-1.06) GND(-2.9,-3.86) GND(-1.5,-1.06) GND(-1.5,-3.86) GND(-1.5,-2.46) GND(-0.1,-1.06) GND(-0.1,-2.46) GND(-0.1,-3.86)
  Keep-Out Layer region: 9,6.75 -9,6.75 -9,12.75 9,12.75
  Keep-Out Layer region: 9,6.75 -9,6.75 -9,12.75 9,12.75
  silkscreen extent -10.3,-12.75 9,12.75, body extent -9,-12.75 9,12.75, height 3.25
XCVR_RFM95W-868S2 [mm]
  rect 1.95x1.05 smd: 1(-7.4,7) 2(-7.4,5) 3(-7.4,3) 4(-7.4,1) 5(-7.4,-1) 6(-7.4,-3) 7(-7.4,-5) 8(-7.4,-7) 9(7.4,-7) 10(7.4,-5) 11(7.4,-3) 12(7.4,-1) 13(7.4,1) 14(7.4,3) 15(7.4,5) 16(7.4,7)
  silkscreen extent -10.04,-8 8,8, body extent -8,-8 8,8, height 1.8
XCVR_SAM-M10Q-00B [mm]
  rect 1.8x1.5 smd paste-2 mask+0.05: 1(-6.6,3.8) 2(-6.6,1.9) 3(-6.6,0) 4(-6.6,-1.9) 5(-6.6,-3.8) 11(6.6,-3.8) 12(6.6,-1.9) 13(6.6,0) 14(6.6,1.9) 15(6.6,3.8)
  rect 1.5x1.8 smd paste-2 mask+0.05: 6(-3.8,-6.6) 7(-1.9,-6.6) 8(0,-6.6) 9(1.9,-6.6) 10(3.8,-6.6) 16(3.8,6.6) 17(1.9,6.6) 18(0,6.6) 19(-1.9,6.6) 20(-3.8,6.6)
  silkscreen extent -8.6,-7.75 7.75,7.75, body extent -7.75,-8 7.75,8, height 6.8
XDCR_BMP280 [mm]
  rect 0.5x0.35 smd: 1(0.8,0.975) 2(0.8,0.325) 3(0.8,-0.325) 4(0.8,-0.975) 5(-0.8,-0.975) 6(-0.8,-0.325) 7(-0.8,0.325) 8(-0.8,0.975)
  silkscreen extent -1,-1.35 1.79,1.35

## Part data
C1 C3 C5 C7 C15 C24 C25 C26: library part CMP-2007-00279-2, "CAP CER 0.1UF 50V X7R 0805", Capacitance="10 uF", Manufacturer=KEMET, Manufacturer Part Number=C0805C104K5RACTU, Package=C0805C-DN, Temperature="-55°C to +125°C", Temperature Characteristic=X7R, Temperature Coefficient=30ppm/°C, Temperature Range High=+125°C, Temperature Range Low=-55°C, Tolerance=0.1, Voltage Rating="50 V", Automotive=No, Category=Cap, ComponentLink2Description=Datasheet, ComponentLink2URL=https://content.kemet.com/datasheets/KEM_C1003_C0G_SMD.pdf, Device Class L1="Passive Components", Device Class L2=Capacitors, Device Class L3="Ceramic Capacitors", Digikey Description="CAP CER 0.1UF 50V X7R 0805", Height=0.88mm, Ipc Land Pattern Name=CAPC200125X78, Lead Free=Yes, Material=Ceramic, Mouser Description="Cap Ceramic 0.1uF 50V X7R 10% SMD 2.0 x 1.2 mm 125 C Paper T/R", Octopart=https://octopart.com/c0805c104k5ractu-kemet-143926, RoHS=TRUE
C2 C4 C6 C8 C9 C14 C20 C21 C22 C23 C27 C28 C30 C31 C32 C33 C34: library part CMP-2007-00279-2, "CAP CER 0.1UF 50V X7R 0805", Capacitance="100 nF", Manufacturer=KEMET, Manufacturer Part Number=C0805C104K5RACTU, Package=C0805C-DN, Temperature="-55°C to +125°C", Temperature Characteristic=X7R, Temperature Coefficient=30ppm/°C, Temperature Range High=+125°C, Temperature Range Low=-55°C, Tolerance=0.1, Voltage Rating="50 V", Automotive=No, Category=Cap, ComponentLink2Description=Datasheet, ComponentLink2URL=https://content.kemet.com/datasheets/KEM_C1003_C0G_SMD.pdf, Device Class L1="Passive Components", Device Class L2=Capacitors, Device Class L3="Ceramic Capacitors", Digikey Description="CAP CER 0.1UF 50V X7R 0805", Height=0.88mm, Ipc Land Pattern Name=CAPC200125X78, Lead Free=Yes, Material=Ceramic, Mouser Description="Cap Ceramic 0.1uF 50V X7R 10% SMD 2.0 x 1.2 mm 125 C Paper T/R", Octopart=https://octopart.com/c0805c104k5ractu-kemet-143926, RoHS=TRUE
C10: library part CMP-07738-122049624-1, "08051C105K4T2A Cap Ceramic 1uF 100V X7R 10% Pad SMD 0805 125C Automotive T/R", Capacitance=1µF, Case/Package=0805, Dielectric=X7R, Max Operating Temperature=125°C, Min Operating Temperature=-55°C, Tolerance=10%, Voltage Rating=100V, Height=1.4mm, Lifecycle Status=Production, Material=Ceramic, NexarPartId=122049624, RoHS=Compliant, Schedule B=8532240020, Voltage Rating (DC)=100V
C11 C13: library part CMP-2007-01227-1, Manufacturer=Kemet, Part Number=C0805S104K5RACTU
C12: library part CMP-1036-04938-1, "CAP 22uF 6.3V ±10% 0805 (2012 Metric) Thickness 1.45mm SMD", Case-EIA=0805, Case-Metric=2012, Rated Voltage="6.3 V", Tolerance=Â±10%, Max Thickness="1.45 mm", Technology=SMT
C17: library part CMP-2007-00279-2, "CAP CER 0.1UF 50V X7R 0805", Capacitance="220 pF", Manufacturer=KEMET, Manufacturer Part Number=C0805C104K5RACTU, Package=C0805C-DN, Temperature="-55°C to +125°C", Temperature Characteristic=X7R, Temperature Coefficient=30ppm/°C, Temperature Range High=+125°C, Temperature Range Low=-55°C, Tolerance=0.1, Voltage Rating="50 V", Automotive=No, Category=Cap, ComponentLink2Description=Datasheet, ComponentLink2URL=https://content.kemet.com/datasheets/KEM_C1003_C0G_SMD.pdf, Device Class L1="Passive Components", Device Class L2=Capacitors, Device Class L3="Ceramic Capacitors", Digikey Description="CAP CER 0.1UF 50V X7R 0805", Height=0.88mm, Ipc Land Pattern Name=CAPC200125X78, Lead Free=Yes, Material=Ceramic, Mouser Description="Cap Ceramic 0.1uF 50V X7R 10% SMD 2.0 x 1.2 mm 125 C Paper T/R", Octopart=https://octopart.com/c0805c104k5ractu-kemet-143926, RoHS=TRUE
C19: library part CMP-2007-00279-2, "CAP CER 0.1UF 50V X7R 0805", Capacitance="22 uF", Manufacturer=KEMET, Manufacturer Part Number=C0805C104K5RACTU, Package=C0805C-DN, Temperature="-55°C to +125°C", Temperature Characteristic=X7R, Temperature Coefficient=30ppm/°C, Temperature Range High=+125°C, Temperature Range Low=-55°C, Tolerance=0.1, Voltage Rating="50 V", Automotive=No, Category=Cap, ComponentLink2Description=Datasheet, ComponentLink2URL=https://content.kemet.com/datasheets/KEM_C1003_C0G_SMD.pdf, Device Class L1="Passive Components", Device Class L2=Capacitors, Device Class L3="Ceramic Capacitors", Digikey Description="CAP CER 0.1UF 50V X7R 0805", Height=0.88mm, Ipc Land Pattern Name=CAPC200125X78, Lead Free=Yes, Material=Ceramic, Mouser Description="Cap Ceramic 0.1uF 50V X7R 10% SMD 2.0 x 1.2 mm 125 C Paper T/R", Octopart=https://octopart.com/c0805c104k5ractu-kemet-143926, RoHS=TRUE
C29: library part CMP-2007-00279-2, "CAP CER 0.1UF 50V X7R 0805", Capacitance="0.10 μF", Manufacturer=KEMET, Manufacturer Part Number=C0805C104K5RACTU, Package=C0805C-DN, Temperature="-55°C to +125°C", Temperature Characteristic=X7R, Temperature Coefficient=30ppm/°C, Temperature Range High=+125°C, Temperature Range Low=-55°C, Tolerance=0.1, Voltage Rating="50 V", Automotive=No, Category=Cap, ComponentLink2Description=Datasheet, ComponentLink2URL=https://content.kemet.com/datasheets/KEM_C1003_C0G_SMD.pdf, Device Class L1="Passive Components", Device Class L2=Capacitors, Device Class L3="Ceramic Capacitors", Digikey Description="CAP CER 0.1UF 50V X7R 0805", Height=0.88mm, Ipc Land Pattern Name=CAPC200125X78, Lead Free=Yes, Material=Ceramic, Mouser Description="Cap Ceramic 0.1uF 50V X7R 10% SMD 2.0 x 1.2 mm 125 C Paper T/R", Octopart=https://octopart.com/c0805c104k5ractu-kemet-143926, RoHS=TRUE
D1: library part CMP-02539-000047-1, "DIODE SCHOTTKY 2A 40V DO-214AC", RoHS Compliant=Yes
D2 D3 D4 D6 D7 D8: "LED;Red;11mcd;0.061In.Dia.;SMD;100mA;2V Vf;635nm;140deg;SMD;White Diffused;5V Vr", Package="0805 Lumex", Check_prices=https://www.snapeda.com/parts/SML-LXT0805IW-TR/Lumex+Opto%252FComponents+Inc./view-part/?ref=eda, MF="Lumex Opto/Components", MP=SML-LXT0805IW-TR, SnapEDA_Link=https://www.snapeda.com/parts/SML-LXT0805IW-TR/Lumex+Opto%252FComponents+Inc./view-part/?ref=snap
D5: "Diode Standard 100 V 300mA (DC) Surface Mount SOD-123", Package="SOD-123 Fairchild Semiconductor", Check_prices=https://www.snapeda.com/parts/1N4148W-7/Diodes+Inc./view-part/?ref=eda, MF="Diodes Inc.", MP=1N4148W-7, SnapEDA_Link=https://www.snapeda.com/parts/1N4148W-7/Diodes+Inc./view-part/?ref=snap
J1: "USB Connectors 24 Receptacle 1 8.94*7.3mm RoHS", Package=Package, Check_prices=https://www.snapeda.com/parts/TYPE-C-31-M-12/HRO+Electronics+Co.%252C+Ltd./view-part/?ref=eda, MF="HRO Electronics Co., Ltd.", MP=TYPE-C-31-M-12, SnapEDA_Link=https://www.snapeda.com/parts/TYPE-C-31-M-12/HRO+Electronics+Co.%252C+Ltd./view-part/?ref=snap
J2: "1 Inner bore SMA Board Edge Positive foot -65â„ƒ~+165â„ƒ 50Î© Plugin RF Connectors / Coaxial Connectors ROHS", Package=None, Check_prices=https://www.snapeda.com/parts/BWSMA-KE-Z001/Bat+Wireless/view-part/?ref=eda, MF="Bat Wireless", MP=BWSMA-KE-Z001, SnapEDA_Link=https://www.snapeda.com/parts/BWSMA-KE-Z001/Bat+Wireless/view-part/?ref=snap
J3: "Micro SD Card Connector, 8 Positions, Connector and Ejector, Push In, Auto Eject Out, Surface Mount, 1.85 mm Heaight Above Board, Gold Flash", Package=None, Check_prices=https://www.snapeda.com/parts/MSD-11-A/Same+Sky/view-part/?ref=eda, MF="Same Sky", MP=MSD-11-A, SnapEDA_Link=https://www.snapeda.com/parts/MSD-11-A/Same+Sky/view-part/?ref=snap
J4: "Description", Manufacturer_Name=JST, Copyright="Copyright (C) 2026 Ultra Librarian. All rights reserved.", Manufacturer_Part_Number=SM04B-SRSS-TB, RefDes=RefDes, Type=Type
LED1 LED2 LED3: "Intelligent control LED integrated light source", Package=None, Check_prices=https://www.snapeda.com/parts/WS2812B/Worldsemi/view-part/?ref=eda, MF=Worldsemi, MP=WS2812B, SnapEDA_Link=https://www.snapeda.com/parts/WS2812B/Worldsemi/view-part/?ref=snap
LS1: "Description", Manufacturer_Name="Jiangsu Huaneng Elec", Copyright="Copyright (C) 2025 Ultra Librarian. All rights reserved.", Manufacturer_Part_Number=MLT-8530, RefDes=RefDes, Type=Type
MCU1: library part ESP32-S3-WROOM-1-N16R2, "Bluetooth, WiFi 802.11b/g/n, Bluetooth v5.0 Transceiver Module 2.4GHz PCB Trace Surface Mount", Package="NON STANDARD Espressif Systems", Check_prices=https://www.snapeda.com/parts/ESP32S3WROOM1N16R2/Espressif+Systems/view-part/?ref=eda, MF="Espressif Systems", MP=ESP32S3WROOM1N16R2, SnapEDA_Link=https://www.snapeda.com/parts/ESP32S3WROOM1N16R2/Espressif+Systems/view-part/?ref=snap
P1: "PCB Terminal Screw 5.08mm 16AWG 400V 13.5A 6 Position COMBICON MKDSN Series", Package=None, Check_prices=https://www.snapeda.com/parts/1729160/Phoenix+Contact/view-part/?ref=eda, MF="Phoenix Contact", MP=1729160, SnapEDA_Link=https://www.snapeda.com/parts/1729160/Phoenix+Contact/view-part/?ref=snap
Q1 Q3 Q4 Q6: library part Component_1
Q2 Q5: library part NCE6005AR
Q7: "N-Channel 30V 270mA _Ta_ 330mW _Ta_ Surface Mount SC-70-3 _SOT323_", Package="SC-70 ON Semiconductor", Availability=Unavailable, MF="ON Semiconductor", MP=NTS4001NT1G, Price=None, SnapEDA_Link=https://www.snapeda.com/parts/NTS4001NT1G/ON%20Semiconductor/view-part/274588/?ref=snap
R1 R2: library part CMP-02407-011165-1, "RES SMD 100 OHM 1% 1/8W 0603", Case Code (Imperial)=0603, Case Code (Metric)=1608, Max Operating Temperature=155°C, Max Power Dissipation=125mW, Min Operating Temperature=-55°C, Package Quantity=1000, Resistance=5.1kR, Resistor Type="Thin Film", Temperature Coefficient=25ppm/°C, Tolerance=0.1%, Voltage Rating=75V, Case/Package=0603, Construction=Rectangular, Depth=0.85mm, Features="Automotive AEC-Q200", Height=0.022inch, Length=1.55mm, Military Standard=Not, Number of Terminations=2, Packaging="Tape and Reel", Power Rating=125mW, Series="MCT 0603 - Precision", Termination=SMD/SMT, Weight=6.7E-05oz, Width=0.033inch
R3 R4: library part CMP-02407-011165-1, "RES SMD 100 OHM 1% 1/8W 0603", Case Code (Imperial)=0603, Case Code (Metric)=1608, Max Operating Temperature=155°C, Max Power Dissipation=125mW, Min Operating Temperature=-55°C, Package Quantity=1000, Resistance=22R, Resistor Type="Thin Film", Temperature Coefficient=25ppm/°C, Tolerance=0.1%, Voltage Rating=75V, Case/Package=0603, Construction=Rectangular, Depth=0.85mm, Features="Automotive AEC-Q200", Height=0.022inch, Length=1.55mm, Military Standard=Not, Number of Terminations=2, Packaging="Tape and Reel", Power Rating=125mW, Series="MCT 0603 - Precision", Termination=SMD/SMT, Weight=6.7E-05oz, Width=0.033inch
R5: library part CMP-02407-011165-1, "RES SMD 100 OHM 1% 1/8W 0603", Case Code (Imperial)=0603, Case Code (Metric)=1608, Max Operating Temperature=155°C, Max Power Dissipation=125mW, Min Operating Temperature=-55°C, Package Quantity=1000, Resistance=47kR, Resistor Type="Thin Film", Temperature Coefficient=25ppm/°C, Tolerance=0.1%, Voltage Rating=75V, Case/Package=0603, Construction=Rectangular, Depth=0.85mm, Features="Automotive AEC-Q200", Height=0.022inch, Length=1.55mm, Military Standard=Not, Number of Terminations=2, Packaging="Tape and Reel", Power Rating=125mW, Series="MCT 0603 - Precision", Termination=SMD/SMT, Weight=6.7E-05oz, Width=0.033inch
R6: library part CMP-02407-011165-1, "RES SMD 100 OHM 1% 1/8W 0603", Case Code (Imperial)=0603, Case Code (Metric)=1608, Max Operating Temperature=155°C, Max Power Dissipation=125mW, Min Operating Temperature=-55°C, Package Quantity=1000, Resistance=100kR, Resistor Type="Thin Film", Temperature Coefficient=25ppm/°C, Tolerance=0.1%, Voltage Rating=75V, Case/Package=0603, Construction=Rectangular, Depth=0.85mm, Features="Automotive AEC-Q200", Height=0.022inch, Length=1.55mm, Military Standard=Not, Number of Terminations=2, Packaging="Tape and Reel", Power Rating=125mW, Series="MCT 0603 - Precision", Termination=SMD/SMT, Weight=6.7E-05oz, Width=0.033inch
R7 R8 R23 R24 R25 R26 R27 R28 R30: library part CMP-02407-011165-1, "RES SMD 100 OHM 1% 1/8W 0603", Case Code (Imperial)=0603, Case Code (Metric)=1608, Max Operating Temperature=155°C, Max Power Dissipation=125mW, Min Operating Temperature=-55°C, Package Quantity=1000, Resistance=10kR, Resistor Type="Thin Film", Temperature Coefficient=25ppm/°C, Tolerance=0.1%, Voltage Rating=75V, Case/Package=0603, Construction=Rectangular, Depth=0.85mm, Features="Automotive AEC-Q200", Height=0.022inch, Length=1.55mm, Military Standard=Not, Number of Terminations=2, Packaging="Tape and Reel", Power Rating=125mW, Series="MCT 0603 - Precision", Termination=SMD/SMT, Weight=6.7E-05oz, Width=0.033inch
R10 R21 R22 R35 R36: library part CMP-02407-011165-1, "RES SMD 100 OHM 1% 1/8W 0603", Case Code (Imperial)=0603, Case Code (Metric)=1608, Max Operating Temperature=155°C, Max Power Dissipation=125mW, Min Operating Temperature=-55°C, Package Quantity=1000, Resistance=4.7kR, Resistor Type="Thin Film", Temperature Coefficient=25ppm/°C, Tolerance=0.1%, Voltage Rating=75V, Case/Package=0603, Construction=Rectangular, Depth=0.85mm, Features="Automotive AEC-Q200", Height=0.022inch, Length=1.55mm, Military Standard=Not, Number of Terminations=2, Packaging="Tape and Reel", Power Rating=125mW, Series="MCT 0603 - Precision", Termination=SMD/SMT, Weight=6.7E-05oz, Width=0.033inch
R11 R13 R14 R16 R18 R19 R31 R32: library part CMP-02407-011165-1, "RES SMD 100 OHM 1% 1/8W 0603", Case Code (Imperial)=0603, Case Code (Metric)=1608, Max Operating Temperature=155°C, Max Power Dissipation=125mW, Min Operating Temperature=-55°C, Package Quantity=1000, Resistance=1kR, Resistor Type="Thin Film", Temperature Coefficient=25ppm/°C, Tolerance=0.1%, Voltage Rating=75V, Case/Package=0603, Construction=Rectangular, Depth=0.85mm, Features="Automotive AEC-Q200", Height=0.022inch, Length=1.55mm, Military Standard=Not, Number of Terminations=2, Packaging="Tape and Reel", Power Rating=125mW, Series="MCT 0603 - Precision", Termination=SMD/SMT, Weight=6.7E-05oz, Width=0.033inch
R12 R17: library part CMP-02407-011165-1, "RES SMD 100 OHM 1% 1/8W 0603", Case Code (Imperial)=0603, Case Code (Metric)=1608, Max Operating Temperature=155°C, Max Power Dissipation=125mW, Min Operating Temperature=-55°C, Package Quantity=1000, Resistance=100R, Resistor Type="Thin Film", Temperature Coefficient=25ppm/°C, Tolerance=0.1%, Voltage Rating=75V, Case/Package=0603, Construction=Rectangular, Depth=0.85mm, Features="Automotive AEC-Q200", Height=0.022inch, Length=1.55mm, Military Standard=Not, Number of Terminations=2, Packaging="Tape and Reel", Power Rating=125mW, Series="MCT 0603 - Precision", Termination=SMD/SMT, Weight=6.7E-05oz, Width=0.033inch
R15 R20: library part CMP-02407-011165-1, "RES SMD 100 OHM 1% 1/8W 0603", Case Code (Imperial)=0603, Case Code (Metric)=1608, Max Operating Temperature=155°C, Max Power Dissipation=125mW, Min Operating Temperature=-55°C, Package Quantity=1000, Resistance=680R, Resistor Type="Thin Film", Temperature Coefficient=25ppm/°C, Tolerance=0.1%, Voltage Rating=75V, Case/Package=0603, Construction=Rectangular, Depth=0.85mm, Features="Automotive AEC-Q200", Height=0.022inch, Length=1.55mm, Military Standard=Not, Number of Terminations=2, Packaging="Tape and Reel", Power Rating=125mW, Series="MCT 0603 - Precision", Termination=SMD/SMT, Weight=6.7E-05oz, Width=0.033inch
R29: library part CMP-02407-011165-1, "RES SMD 100 OHM 1% 1/8W 0603", Case Code (Imperial)=0603, Case Code (Metric)=1608, Max Operating Temperature=155°C, Max Power Dissipation=125mW, Min Operating Temperature=-55°C, Package Quantity=1000, Resistance=33R, Resistor Type="Thin Film", Temperature Coefficient=25ppm/°C, Tolerance=0.1%, Voltage Rating=75V, Case/Package=0603, Construction=Rectangular, Depth=0.85mm, Features="Automotive AEC-Q200", Height=0.022inch, Length=1.55mm, Military Standard=Not, Number of Terminations=2, Packaging="Tape and Reel", Power Rating=125mW, Series="MCT 0603 - Precision", Termination=SMD/SMT, Weight=6.7E-05oz, Width=0.033inch
R33 R34: library part CMP-02407-011165-1, "RES SMD 100 OHM 1% 1/8W 0603", Case Code (Imperial)=0603, Case Code (Metric)=1608, Max Operating Temperature=155°C, Max Power Dissipation=125mW, Min Operating Temperature=-55°C, Package Quantity=1000, Resistance=470R, Resistor Type="Thin Film", Temperature Coefficient=25ppm/°C, Tolerance=0.1%, Voltage Rating=75V, Case/Package=0603, Construction=Rectangular, Depth=0.85mm, Features="Automotive AEC-Q200", Height=0.022inch, Length=1.55mm, Military Standard=Not, Number of Terminations=2, Packaging="Tape and Reel", Power Rating=125mW, Series="MCT 0603 - Precision", Termination=SMD/SMT, Weight=6.7E-05oz, Width=0.033inch
R37 R38 R39 R40: library part CMP-02407-011165-1, "RES SMD 100 OHM 1% 1/8W 0603", Case Code (Imperial)=0603, Case Code (Metric)=1608, Max Operating Temperature=155°C, Max Power Dissipation=125mW, Min Operating Temperature=-55°C, Package Quantity=1000, Resistance=150R, Resistor Type="Thin Film", Temperature Coefficient=25ppm/°C, Tolerance=0.1%, Voltage Rating=75V, Case/Package=0603, Construction=Rectangular, Depth=0.85mm, Features="Automotive AEC-Q200", Height=0.022inch, Length=1.55mm, Military Standard=Not, Number of Terminations=2, Packaging="Tape and Reel", Power Rating=125mW, Series="MCT 0603 - Precision", Termination=SMD/SMT, Weight=6.7E-05oz, Width=0.033inch
S1 S2: library part SKRPABE010, "Switch Tactile N.O. SPST Button J-Bend 0.05A 16VDC 1.57N SMD Automotive T/R", Package=None, Check_prices=https://www.snapeda.com/parts/SKRPABE010/ALPS/view-part/?ref=eda, MF=ALPS, MP=SKRPABE010, SnapEDA_Link=https://www.snapeda.com/parts/SKRPABE010/ALPS/view-part/?ref=snap
U1: "1A LOW DROPOUT VOLTAGE REGULATOR", Package="SOT-223 Seeed Technology", Availability="Not in stock", Check_prices=https://www.snapeda.com/parts/AMS1117-5.0/ams/view-part/?ref=eda, MF=ams, MP=AMS1117-5.0, Price=None, SnapEDA_Link=https://www.snapeda.com/parts/AMS1117-5.0/ams/view-part/?ref=snap
U2: library part AMS1117-5.0, "1A LOW DROPOUT VOLTAGE REGULATOR", Package="SOT-223 Seeed Technology", Availability="Not in stock", Check_prices=https://www.snapeda.com/parts/AMS1117-5.0/ams/view-part/?ref=eda, MF=ams, MP=AMS1117-5.0, Price=None, SnapEDA_Link=https://www.snapeda.com/parts/AMS1117-5.0/ams/view-part/?ref=snap
U4: "General ISM < 1GHz LoRaâ„¢ Transceiver Module 868MHz Antenna Not Included Surface Mount", Package="Non Standard RF Solutions", Availability="In Stock", Check_prices=https://www.snapeda.com/parts/RFM95W-868S2/RF+Solutions/view-part/?ref=eda, MF=RF, MP=RFM95W-868S2, Price=None, Purchase-URL=https://pricing.snapeda.com/search?q=RFM95W-868S2&ref=eda, SnapEDA_Link=https://www.snapeda.com/parts/RFM95W-868S2/RF+Solutions/view-part/?ref=snap
U5 U6 U7 U8: "Optocoupler DC-IN 1-CH Transistor DC-OUT 4-Pin DIP SMD T/R", Package="SMD-4 Sharp Microelectronics", Check_prices=https://www.snapeda.com/parts/PC817X2NIP1B/Sharp+Microelectronics/view-part/?ref=eda, MF="Sharp Microelectronics", MP=PC817X2NIP1B, SnapEDA_Link=https://www.snapeda.com/parts/PC817X2NIP1B/Sharp+Microelectronics/view-part/?ref=snap
U9: "- RF Receiver Galileo, GLONASS, GPS 1.575GHz, 1.602GHz -165dBm 400kbps On-Board, Patch Module", Package=None, Check_prices=https://www.snapeda.com/parts/SAM-M10Q-00B/u-blox/view-part/?ref=eda, MF=u-blox, MP=SAM-M10Q-00B, SnapEDA_Link=https://www.snapeda.com/parts/SAM-M10Q-00B/u-blox/view-part/?ref=snap
U10: Package=None, Check_prices=https://www.snapeda.com/parts/MPU-6050-A/InvenSense/view-part/?ref=eda, MF="TDK InvenSense", MP=MPU-6050-A, SnapEDA_Link=https://www.snapeda.com/parts/MPU-6050-A/InvenSense/view-part/?ref=snap
U11: "BMP280 Absolute Barometric Pressure Sensor for Battery Powered Devices 2 x 2.5mm", Package=None, Availability=Unavailable, MP=BMP280, Price=None

## Via types
v1: diameter 20, hole 10, Top Layer to Bottom Layer, tented both sides, 110 vias
v2: diameter 196.85, hole 131.89, Top Layer to Bottom Layer, 4 vias

## Nets (pads, with @x,y where several pads share a name; then routed paths per layer and width w, separated by ;. In a path a pad name is that pad's centre, name@x,y a point inside that pad or via, vN(x,y) a via of type N, cw(c..) or ccw(c..) an arc to the next point about the centre after c; other vN are vias at no path point)
BOOT: C13.2 MCU1.27 R8.2 S2.1 S2.2 | length 1090.5
  Top Layer w10: S2.2@63.31,1317.68 226.69,1317.68 330.33,1317.68 340,1327.35 482.65,1327.35 v1(515,1295) ; MCU1.27@987.91,1220.47 987.91,1232.28 1013.72,1258.09 1033.09,1258.09 v1(1035,1260)
  GND w10: v1(515,1295) 648,1295 668,1315 980,1315 v1(1035,1260)
BUZZER: MCU1.22 Q7.1 R30.1 | length 542.6
  Top Layer w10: MCU1.22@1044.84,943.27 1086.73,943.27 v1(1105,925)
  Top Layer w20: MCU1.22@1037.13,950.98 MCU1.22@1044.84,943.27
  GND w10: v1(1105,925) 1265,925 1305,965 v1(1370,965)
  Bottom Layer w10: R30.1@1326.51,1010 1370,966.54 v1(1370,965)
  Bottom Layer w20: Q7.1@1319.45,1126.42 1319.45,1113.94 1326.51,1106.87 R30.1@1326.51,1010
CSB: R36.2 U11.2 | length 236.9
  Top Layer w10: R36.2@345,1462.38 360.91,1478.29 384.43,1478.29 384.43,1534.43 398.98,1548.98 398.98,1580.18 404.84,1586.04 452.5,1586.04 458.35,1580.18 458.35,1577.85 465.17,1571.04 U11.2@465.17,1564.31